# Altium PCB PCB_Input_SubSystem.pcbdoc
Units mm, origin at the board's own origin, x right, y up, seen from the top; angles counter-clockwise.
Board outline 125.09 x 135.64 mm, 2 copper layers (Top Layer, Bottom Layer); 27 components, 29 nets, 116 pads, 0 vias.
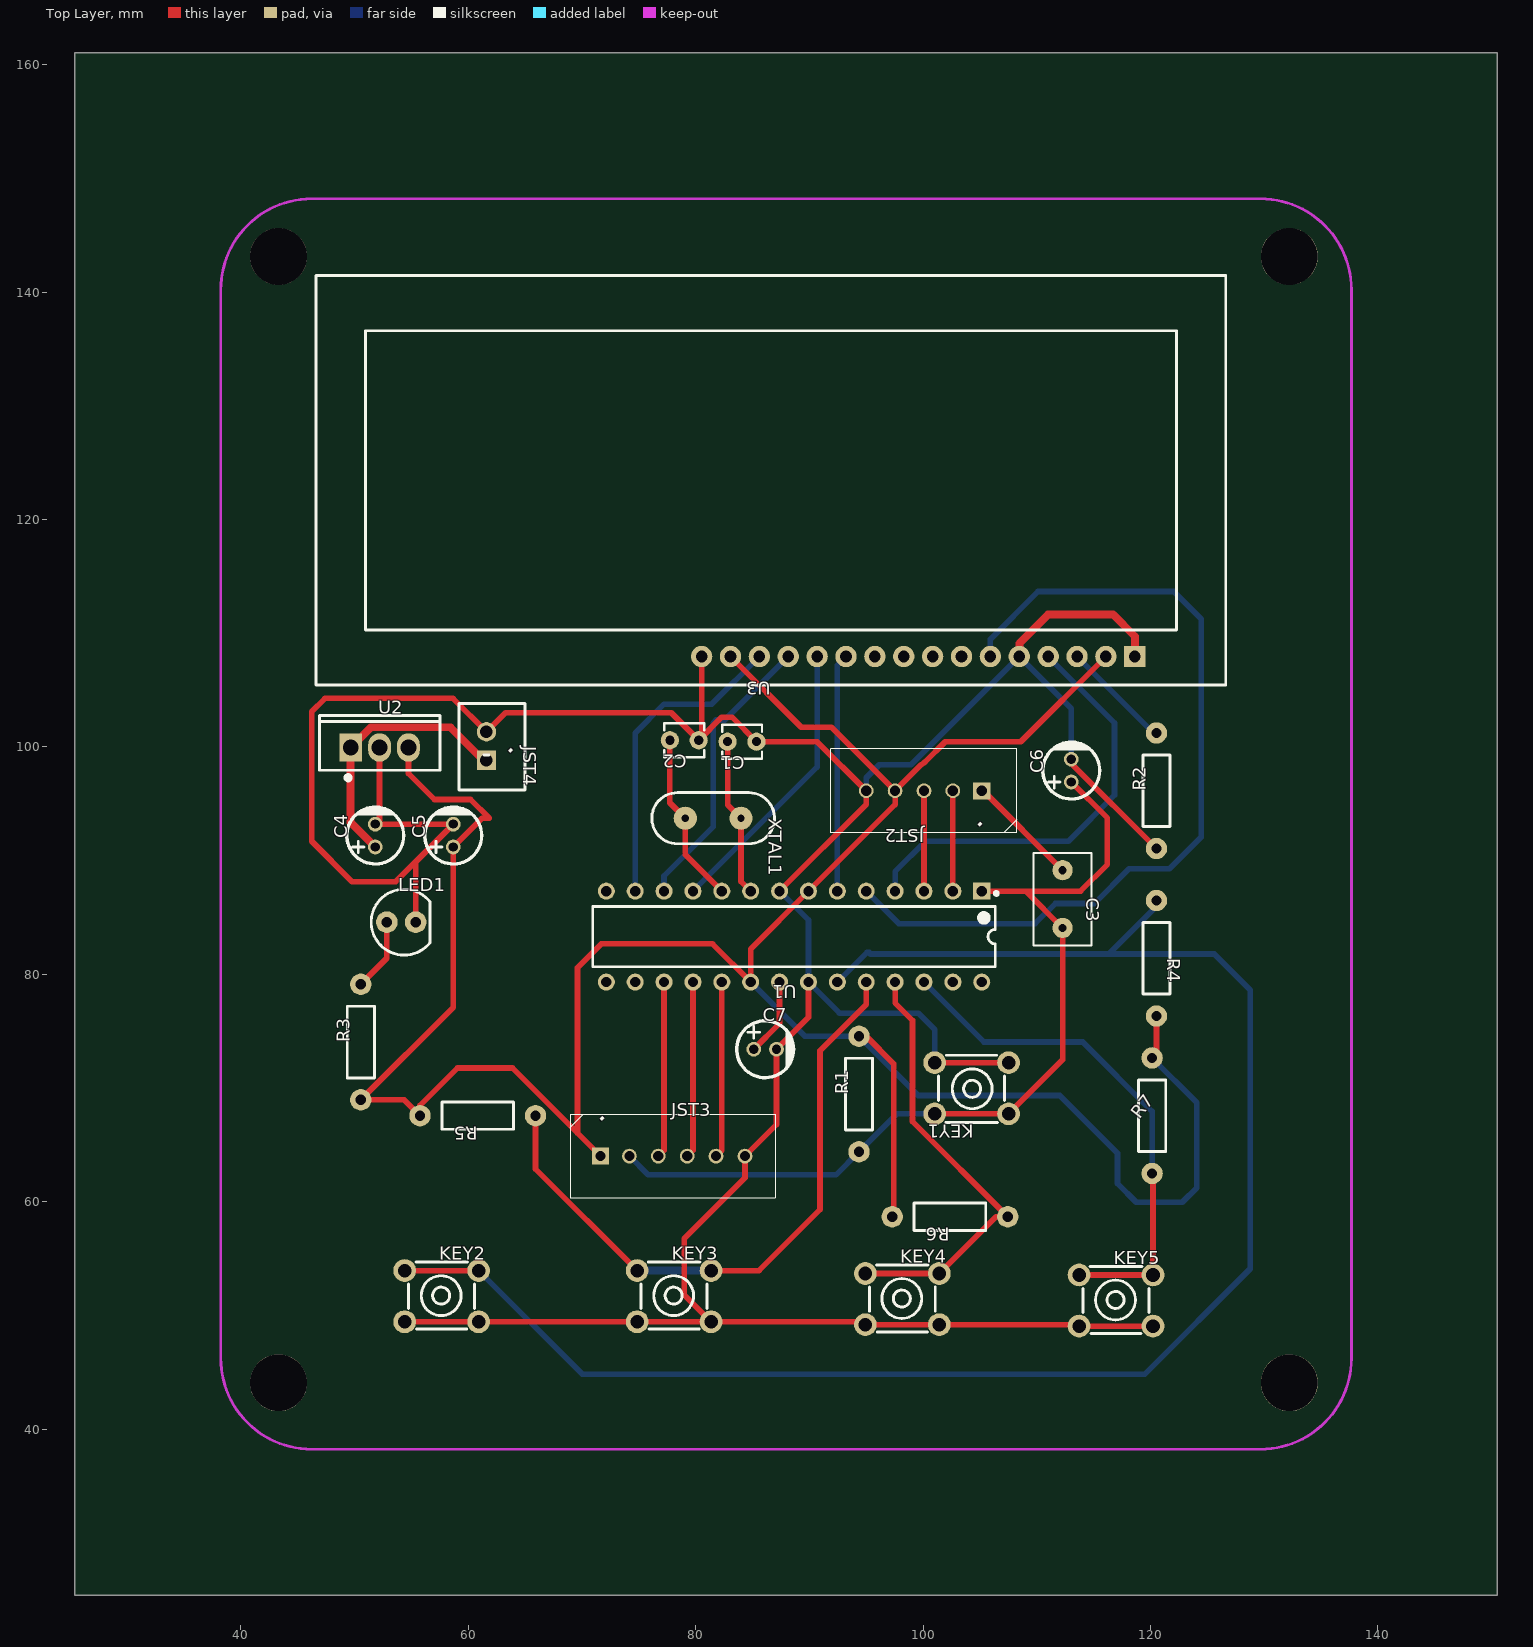
[diagram p0: Top Layer view]
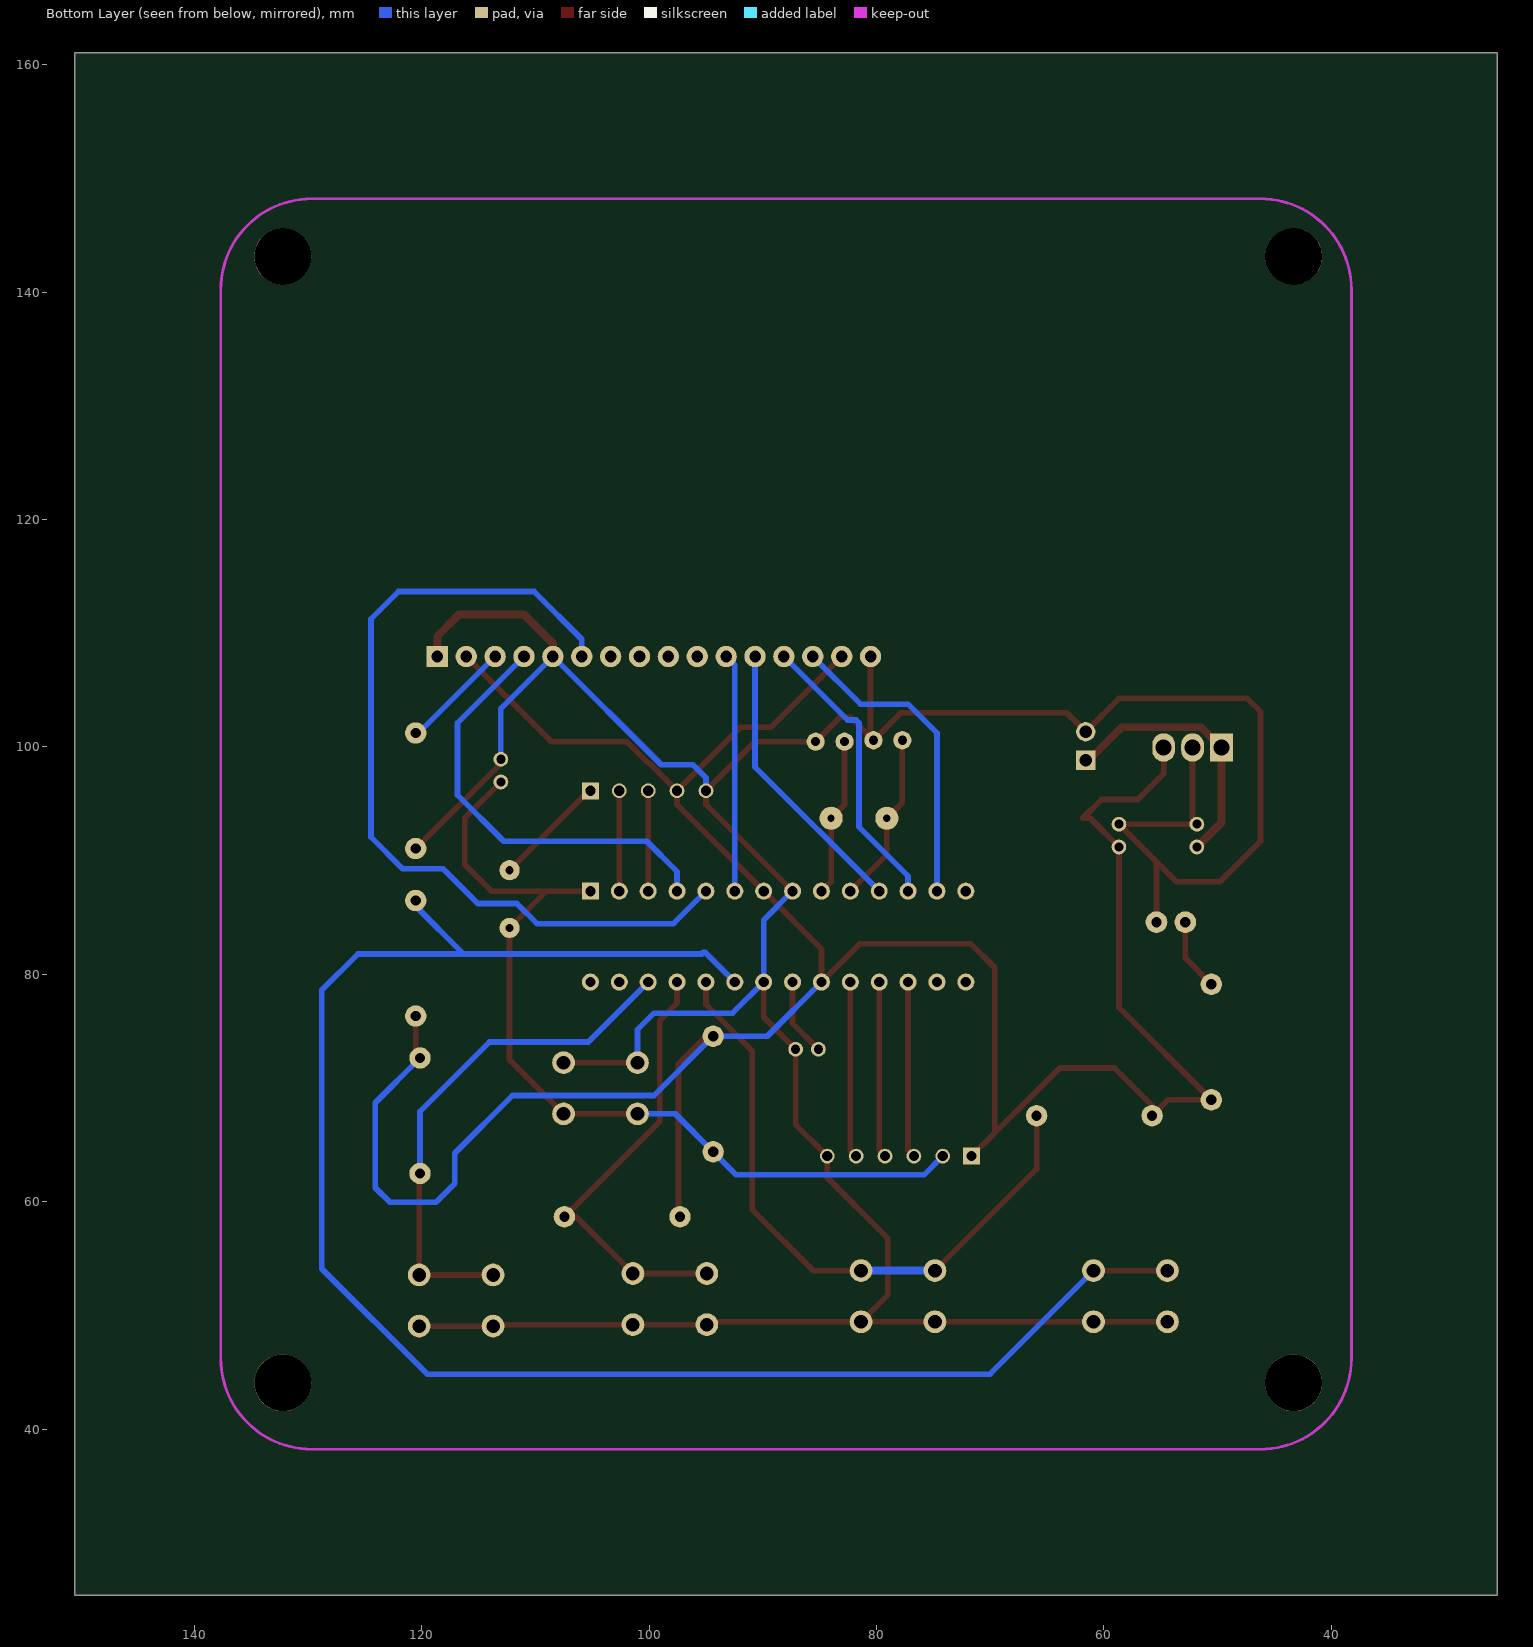
[diagram p1: Bottom Layer view, seen from below]

## Layer stack, top to bottom
Top Layer: signal copper (thickness not stored)
Dielectric: dielectric 0.32, FR-4, Dk 4.8
Bottom Layer: signal copper (thickness not stored)

## Board outline
150.495,25.4 25.4,25.4 25.4,161.036 150.495,161.036

## Components (designator, comment, footprint, x,y, rotation, side; value= is the part's Value field where it differs from the comment)
C1 "22pF" CAP-TH_L3.5-W3.0-P2.54-D0.8 84.074,100.457 r180 top
C2 "22pF" CAP-TH_L3.5-W3.0-P2.54-D0.8 78.994,100.584 r180 top
C3 "100nF" RAD-0.2 112.268,86.614 r270 top
C4 "330nF" CAP-TH_BD5.0-P2.00-D0.8-FD 51.816,92.202 r90 top
C5 "100nF" CAP-TH_BD5.0-P2.00-D0.8-FD 58.674,92.202 r90 top
C6 "100nF" CAP-TH_BD5.0-P2.00-D0.8-FD 113.03,97.917 r90 top
C7 "100nF" CAP-TH_BD5.0-P2.00-D0.8-FD 86.106,73.406 r0 top
JST2 "JST_5 PIN Female con." "JST 2.54MM MALE 5 PIN CONNECTOR" 100.076,96.139 r180 top
JST3 "JST 2.54 Male con." "JST 2.54MM MALE 6 PIN CONNECTOR_N" 77.978,64.008 r0 top
JST4 "JST_2 PIN" CONN-TH_XHB-2A 61.595,100.076 r270 top
KEY1 "RESET BTN" KEY-TH_4P-L6.0-W6.0-P4.50 104.267,69.977 r180 top
KEY2 "Push_Button" KEY-TH_4P-L6.0-W6.0-P4.50 57.658,51.689 r0 top
KEY3 "Push_Button" KEY-TH_4P-L6.0-W6.0-P4.50 78.105,51.689 r0 top
KEY4 "Push_Button" KEY-TH_4P-L6.0-W6.0-P4.50 98.171,51.435 r0 top
KEY5 "Push_Button" KEY-TH_4P-L6.0-W6.0-P4.50 116.967,51.308 r0 top
LED1 "LED" "5MM LED" 52.832,84.582 r0 top
R1 "10K" AXIAL-0.4 94.361,69.469 r90 top
R2 "10K" AXIAL-0.4 120.523,96.139 r90 top
R3 "330R" AXIAL-0.4 50.546,74.041 r90 top
R4 "4.7K" AXIAL-0.4 120.523,81.407 r270 top
R5 "4.7K" AXIAL-0.4 60.833,67.564 r180 top
R6 "4.7K" AXIAL-0.4 102.362,58.674 r180 top
R7 "4.7K" AXIAL-0.4 120.142,67.564 r90 top
U1 "ATMEGA _328P-PU" DIP-28_L34.6-W7.3-P2.54-LS10.2-BL 88.646,83.312 r180 top
U2 "7805_Regulator" TO-220-3_L10.0-W4.5-P2.54-L 52.197,99.949 r0 top
U3 "LCD-16X2SILK" LCD-16X2 99.568,107.95 r180 top
XTAL1 "16MHz" "16MHZ_OSC [PCB]" 81.534,93.726 r270 top

## Footprints (in the part's own frame and the unit in brackets; to place one, negate y for a bottom-side part, rotate by r counter-clockwise, add the part's x,y. Pads: shape width x height; smd on the part's side, far side on the other; paste and mask are expansions set on the pad)
"5MM LED" [mm]
  round 1.9 hole 0.914: 1(0,0) 2(2.54,0)
  silkscreen extent -1.37,-2.9 3.81,2.9
"16MHZ_OSC [PCB]" [mil]
  round 80 hole 25: 1(0,96.46) 2(0,-96.46)
  silkscreen extent -89,-212 89,212
AXIAL-0.4 [mil]
  round 74 hole 35.4: 1(-200,0) 2(200,0)
  silkscreen extent -124,-47 124,47
CAP-TH_BD5.0-P2.00-D0.8-FD [mm]
  round 1.3 hole 0.8: 1(-1,0) 2(1,0)
  silkscreen extent -2.5,-2.5 2.5,2.5
CAP-TH_L3.5-W3.0-P2.54-D0.8 [mm]
  round 1.6 hole 0.8: 1(-1.27,0) 2(1.27,0)
  silkscreen extent -1.75,-1.5 1.75,1.5
CONN-TH_XHB-2A [mm]
  rect 1.7x1.7 hole 1.1: 1(1.251,0)
  round 1.7 hole 1.1: 2(-1.251,0)
  silkscreen extent -3.75,-2.42 3.86,3.4
DIP-28_L34.6-W7.3-P2.54-LS10.2-BL [mm]
  rect 1.5x1.5 hole 0.9: 1(-16.51,-4)
  round 1.5 hole 0.9: 2(-13.97,-4) 3(-11.43,-4) 4(-8.89,-4) 5(-6.35,-4) 6(-3.81,-4) 7(-1.27,-4) 8(1.27,-4) 9(3.81,-4) 10(6.35,-4) 11(8.89,-4) 12(11.43,-4) 13(13.97,-4) 14(16.51,-4) 15(16.51,4) 16(13.97,4) 17(11.43,4) 18(8.89,4) 19(6.35,4) 20(3.81,4) 21(1.27,4) 22(-1.27,4) 23(-3.81,4) 24(-6.35,4) 25(-8.89,4) 26(-11.43,4) 27(-13.97,4) 28(-16.51,4)
  silkscreen extent -17.94,-3.95 17.7,2.65
"JST 2.54MM MALE 5 PIN CONNECTOR" [mm]
  rect 1.5x1.5 hole 0.9: 1(-5.08,0)
  round 1.3 hole 0.9: 2(-2.54,0) 3(0,0) 4(2.54,0) 5(5.08,0)
  silkscreen extent -8.17,-3.68 8.21,3.68
"JST 2.54MM MALE 6 PIN CONNECTOR_N" [mm]
  rect 1.5x1.5 hole 0.9: 1(-6.35,0.001)
  round 1.3 hole 0.9: 2(-3.81,0.001) 3(-1.27,0.001) 4(1.27,0.001) 5(3.81,0.001) 6(6.35,0.001)
  silkscreen extent -9.01,-3.68 9.01,3.68
KEY-TH_4P-L6.0-W6.0-P4.50 [mm]
  round 2 hole 1.2: 1(-3.25,-2.25) 2(3.25,-2.25) 3(3.25,2.25) 4(-3.25,2.25)
  silkscreen extent -2.9,-2.9 2.9,3
LCD-16X2 [mil]
  rect 74x74 hole 40: 1(-750,0)
  round 74 hole 40: 2(-650,0) 3(-550,0) 4(-450,0) 5(-350,0) 6(-250,0) 7(-150,0) 8(-50,0) 9(50,0) 10(150,0) 11(250,0) 12(350,0) 13(450,0) 14(550,0) 15(650,0) 16(750,0)
  silkscreen extent -1065,-1319 2085,99
RAD-0.2 [mil]
  round 70 hole 28: 1(100,0) 2(-100,0)
  silkscreen extent -160,-100 160,100
TO-220-3_L10.0-W4.5-P2.54-L [mm]
  rect 2x2.5 hole 1.4: 1(-2.54,0)
  oval 2x2.5 hole 1.4: 2(0,0) 3(2.54,0)
  silkscreen extent -5.3,-2.86 5.3,2.8

## Free pads (board coordinates)
  round 5 hole 5: 11(132.207,143.129) 12(132.207,44.069) 14(43.307,44.069) 15(43.307,143.129)

## Nets (pads, with @x,y where several pads share a name; then routed paths per layer and width w, separated by ;. In a path a pad name is that pad's centre, name@x,y a point inside that pad or via, vN(x,y) a via of type N, cw(c..) or ccw(c..) an arc to the next point about the centre after c; other vN are vias at no path point)
0: pad.11
1: pad.12
2: pad.14
5V: C5.1 JST2.4 JST3.1 R1.2 R3.1 R4.2 R5.2 R6.2 R7.2 U1.7 U1.20 U2.3 U3.2 U3.15 | length 251.6
  Top Layer w0.5: U2.3 54.737,97.663 57.023,95.377 60.198,95.377 61.849,93.726 61.198,93.726 C5.1 58.674,77.089 R3.1 54.356,68.961 R5.2 55.753,68.453 59.055,71.755 63.882,71.755 JST3.1 69.596,66.04 69.596,80.581 71.691,82.677 81.471,82.677 U1.20 84.836,82.232 U1.7 97.536,94.932 JST2.4 ; U3.15 89.281,101.727 91.948,101.727 JST2.4 ; R1.2 94.996,74.549 97.409,72.136 97.409,58.801 R6.2 ; U3.2 108.585,100.457 101.948,100.457 100.17,98.679 99.822,98.425 JST2.4 ; R7.2 120.523,73.025 R4.2
  Bottom Layer w0.5: U1.20 89.599,74.549 R1.2 99.568,69.342 112.014,69.342 117.094,64.262 117.094,61.6 118.75,59.944 122.791,59.944 124.079,61.232 124.079,68.707 R7.2
11: pad.15
BTN1: KEY2.3 KEY2.4 R4.1 U1.23 | length 151.9
  Top Layer w0.5: KEY2.4@54.408,53.939 KEY2.3@60.908,53.939
  Bottom Layer w0.5: KEY2.3@60.908,53.939 70.016,44.831 119.507,44.831 128.778,54.102 128.778,78.613 125.603,81.788 116.177,81.788 ; U1.23 95.059,81.915 95.25,81.915 95.377,81.788 116.332,81.788 120.523,85.979 R4.1
BTN2: KEY3.3 KEY3.4 R5.1 U1.24 | length 57.3
  Top Layer w0.5: R5.1 65.913,62.881 KEY3.4@74.855,53.939 ; KEY3.3@81.355,53.939 85.562,53.939 90.932,59.309 90.932,73.279 94.996,77.343 U1.24
  Bottom Layer w0.7: KEY3.4@74.855,53.939 KEY3.3@81.355,53.939
BTN3: KEY4.3 KEY4.4 R6.1 U1.25 | length 39.3
  Top Layer w0.5: KEY4.4@94.921,53.685 101.421,53.685 106.41,58.674 R6.1 99.06,67.056 99.06,75.946 97.536,77.47 U1.25
BTN4: KEY5.3 KEY5.4 R7.1 U1.26 | length 45.7
  Top Layer w0.5: KEY5.4@113.717,53.558 120.217,53.558 120.217,62.409 R7.1
  Bottom Layer w0.5: U1.26 105.347,74.041 114.046,74.041 120.142,67.945 R7.1
D4: U1.6 U3.11 | length 21
  Bottom Layer w0.5: U1.6 92.456,107.188 U3.11
D5: U1.11 U3.12 | length 25.2
  Bottom Layer w0.5: U1.11 90.678,98.234 U3.12
D6: U1.12 U3.13 | length 25.6
  Bottom Layer w0.5: U1.12 77.216,88.646 81.534,92.964 81.534,102.108 81.788,102.362 82.55,102.362 U3.13
D7: U1.13 U3.14 | length 27.6
  Bottom Layer w0.5: U1.13 74.676,101.219 77.216,103.759 81.407,103.759 U3.14
E: U1.5 U3.6 | length 75.8
  Bottom Layer w0.5: U1.5 97.853,84.455 109.855,84.455 111.633,86.233 115.062,86.233 118.11,89.281 121.676,89.281 124.46,92.065 124.46,111.252 122.047,113.665 110.109,113.665 105.918,109.474 U3.6
GND: C1.1 C2.1 C4.2 C5.2 C6.2 C7.2 JST2.5 JST3.6 JST4.2 KEY1.1 KEY1.2 KEY2.1 KEY2.2 KEY3.1 KEY3.2 KEY4.1 KEY4.2 KEY5.1 KEY5.2 LED1.2 R2.1 U1.8 U1.22 U2.2 U3.1 U3.5 U3.16 | length 314.8
  Top Layer w0.5: U2.2 52.197,93.583 C4.2 C5.2 55.372,89.9 LED1.2 ; KEY2.1@54.408,49.439 60.908,49.439 74.855,49.439 KEY3.2@81.355,49.439 ; C5.2 53.609,88.138 49.784,88.138 46.228,91.694 46.228,103.104 47.391,104.267 58.654,104.267 JST4.2@61.595,101.328 ; JST4.2 63.265,102.997 77.851,102.997 C2.1 ; U3.16 80.518,100.838 C2.1 ; U1.8 94.996,94.932 JST2.5 90.678,100.457 C1.1 83.185,102.616 82.296,102.616 C2.1 ; U1.22 89.916,76.216 C7.2 87.106,66.787 JST3.6 84.328,62.103 78.994,56.769 78.994,51.8 KEY3.2@81.355,49.439 ; KEY1.2@101.017,72.227 KEY1.1@107.517,72.227 ; C6.2 113.03,98.552 R2.1 ; KEY5.2@120.217,49.058 113.717,49.058 113.59,49.185 101.421,49.185 94.921,49.185 94.667,49.439 KEY3.2@81.355,49.439
  Top Layer w0.7: U3.5 108.458,109.093 110.998,111.633 116.713,111.633 118.618,109.728 U3.1
  Bottom Layer w0.5: U1.8 89.916,84.772 U1.22 92.647,76.581 99.568,76.581 101.017,75.132 KEY1.2@101.017,72.227 ; JST2.5 94.996,97.282 96.139,98.425 98.933,98.425 U3.5 113.03,103.378 C6.2
JST2_1: C3.2 JST2.1 | length 10
  Top Layer w0.5: JST2.1 105.283,96.139 C3.2
LED1_1: LED1.1 R3.2 | length 6.4
  Top Layer w0.5: R3.2 52.832,81.407 LED1.1
MISO: JST3.4 U1.18 | length 15.5
  Top Layer w0.5: JST3.4 79.756,64.517 U1.18
MOSI: JST3.3 U1.17 | length 15.5
  Top Layer w0.5: JST3.3 77.216,64.517 U1.17
RESET: C3.1 C6.1 JST3.2 KEY1.3 KEY1.4 R1.1 U1.1 | length 83.6
  Top Layer w0.5: KEY1.3@101.017,67.727 107.517,67.727 112.268,72.478 C3.1 109.03,87.312 U1.1 113.855,87.312 116.205,89.662 116.205,93.742 C6.1
  Bottom Layer w0.5: JST3.2 75.819,62.357 92.329,62.357 R1.1 97.699,67.727 KEY1.3@101.017,67.727
RS: U1.4 U3.4 | length 38.4
  Bottom Layer w0.5: U1.4 97.536,89.027 100.203,91.694 112.776,91.694 116.84,95.758 116.84,102.108 U3.4
RX: JST2.3 U1.3 | length 8.8
  Top Layer w0.5: U1.3 JST2.3
SCK: JST3.5 U1.19 | length 15.5
  Top Layer w0.5: JST3.5 82.296,64.517 U1.19
TX: JST2.2 U1.2 | length 8.8
  Top Layer w0.5: U1.2 JST2.2
U1_9: C1.2 U1.9 XTAL1.1 | length 14
  Top Layer w0.5: C1.2 82.804,94.906 XTAL1.1 83.984,88.164 U1.9
U1_10: C2.2 U1.10 XTAL1.2 | length 15.2
  Top Layer w0.5: C2.2 77.724,95.086 XTAL1.2 79.084,90.524 U1.10
U1_21: C7.1 U1.21 | length 6.8
  Top Layer w0.5: C7.1 87.376,75.676 U1.21
U3_3: R2.2 U3.3 | length 9.8
  Bottom Layer w0.5: U3.3 120.269,101.219 R2.2
VCC: C4.1 JST4.1 U2.1 | length 23.5
  Top Layer w0.7: C4.1 49.657,93.361 U2.1 51.435,101.727 58.42,101.727 61.322,98.825 JST4.1
pads on no net: U1.14 U1.15 U1.16 U1.27 U1.28 U3.7 U3.8 U3.9 U3.10

## Keep-outs
Keep-Out Layer:
  lines w0.254: 38.227,46.227 ccw(c46.227,46.227) 46.227,38.227 ; 38.227,140.209 cw(c46.227,140.209) 46.227,148.209 ; 129.668,38.227 ccw(c129.668,46.227) 137.668,46.227 ; 129.668,148.209 cw(c129.668,140.209) 137.668,140.209

## Text inside footprints (layer, text, board x,y; h text height)
U3: Document "1" at 120.904,107.95 h0.51